# Altium PCB TurboCtrl.PcbDoc (part 1 of 2)
Units mil, origin at the board's own origin, x right, y up, seen from the top; angles counter-clockwise.
Board outline 1584.83 x 1584.83 mil, 4 copper layers (Top Layer, GND, SIGNAL, Bottom Layer), stack 61.85 mil thick; 89 components, 88 nets, 364 pads, 205 vias.
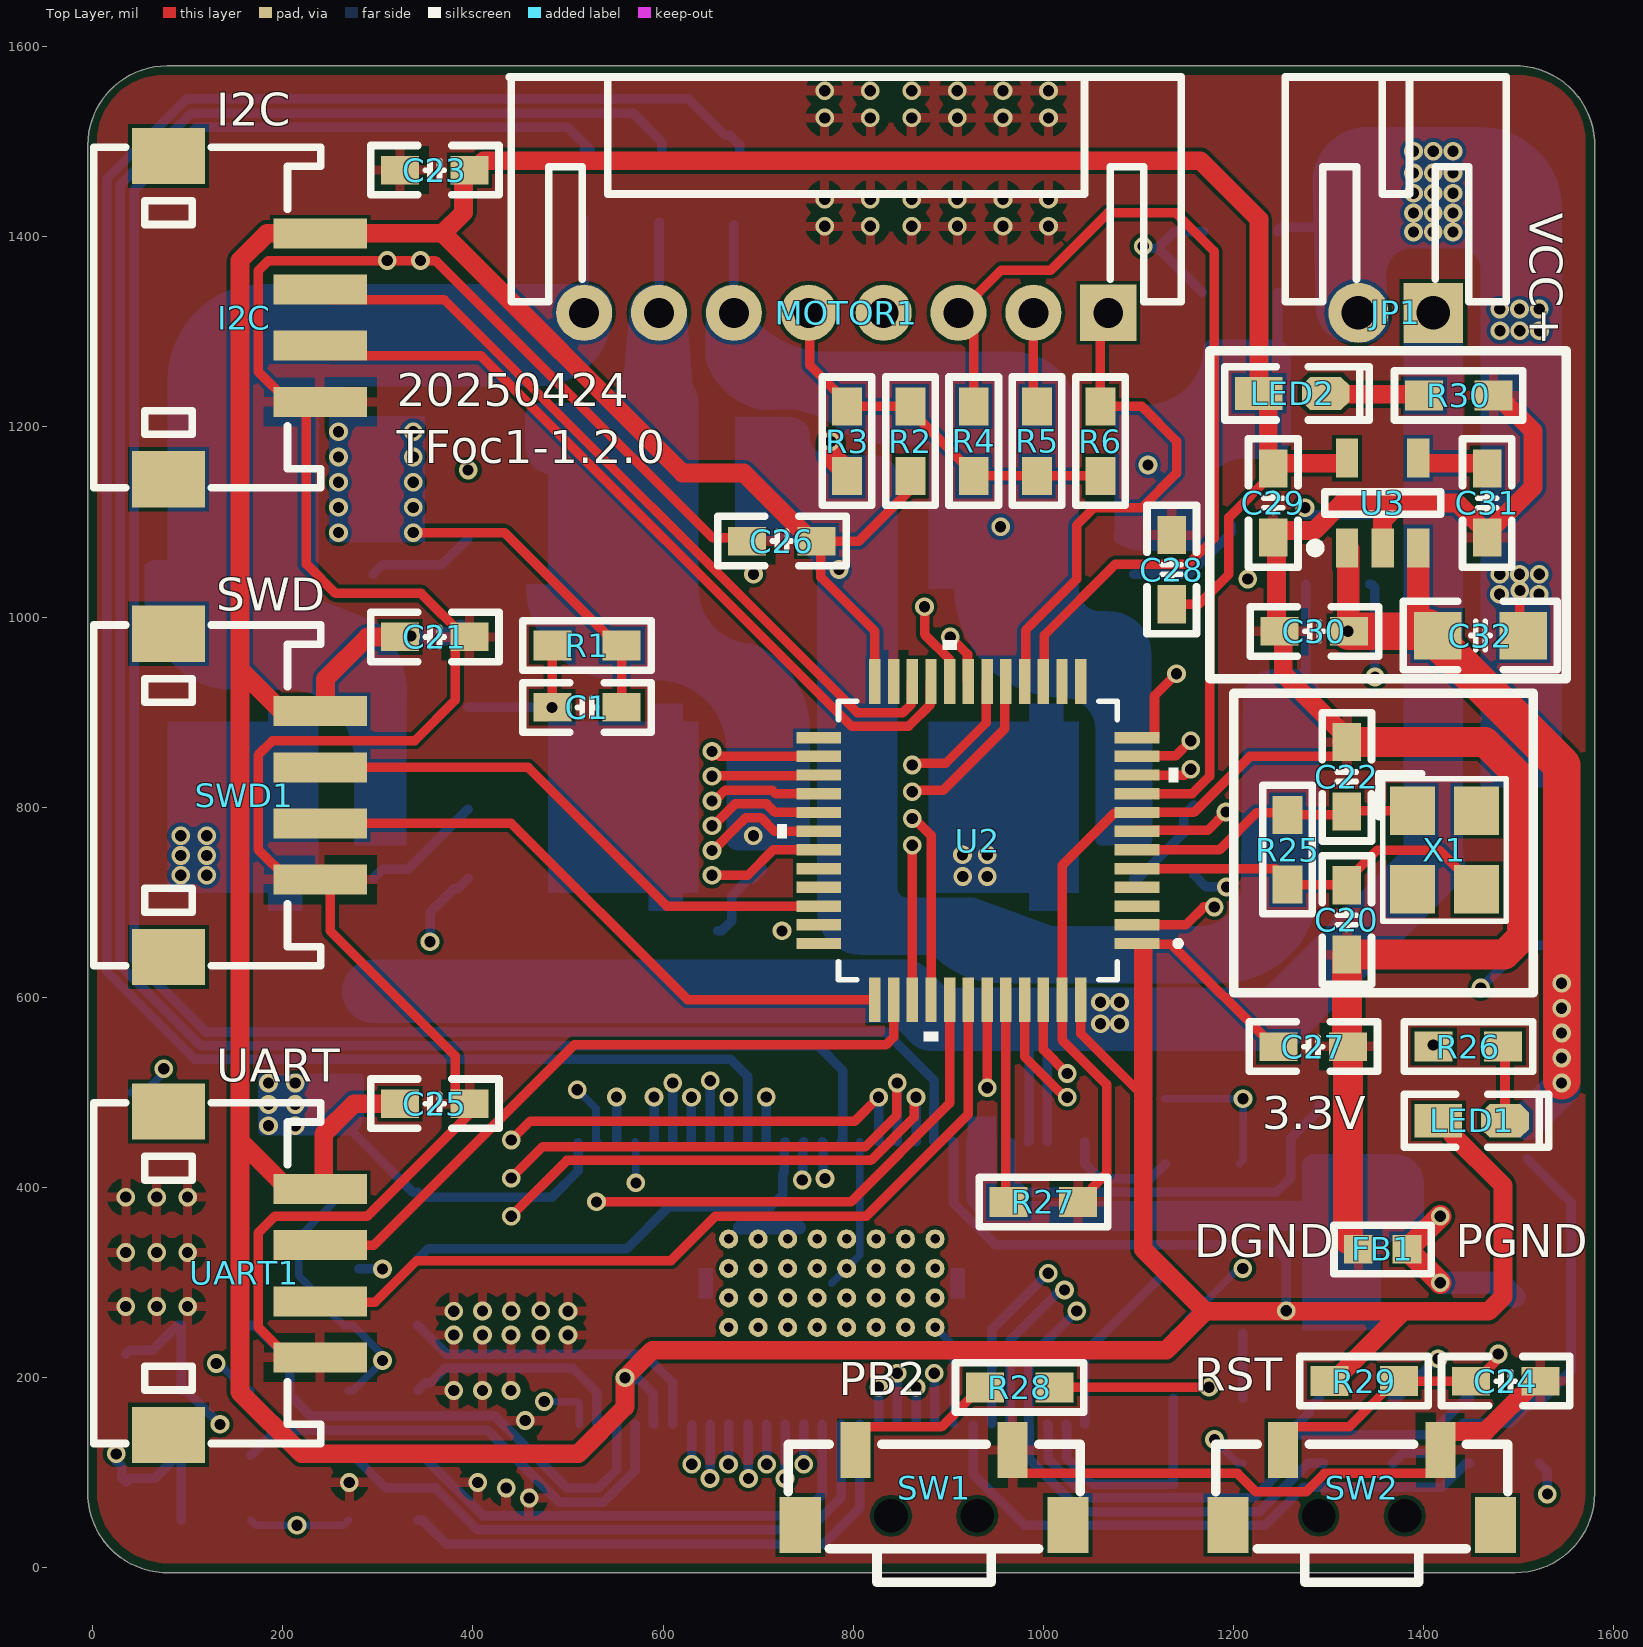
[diagram p0: Top Layer view]
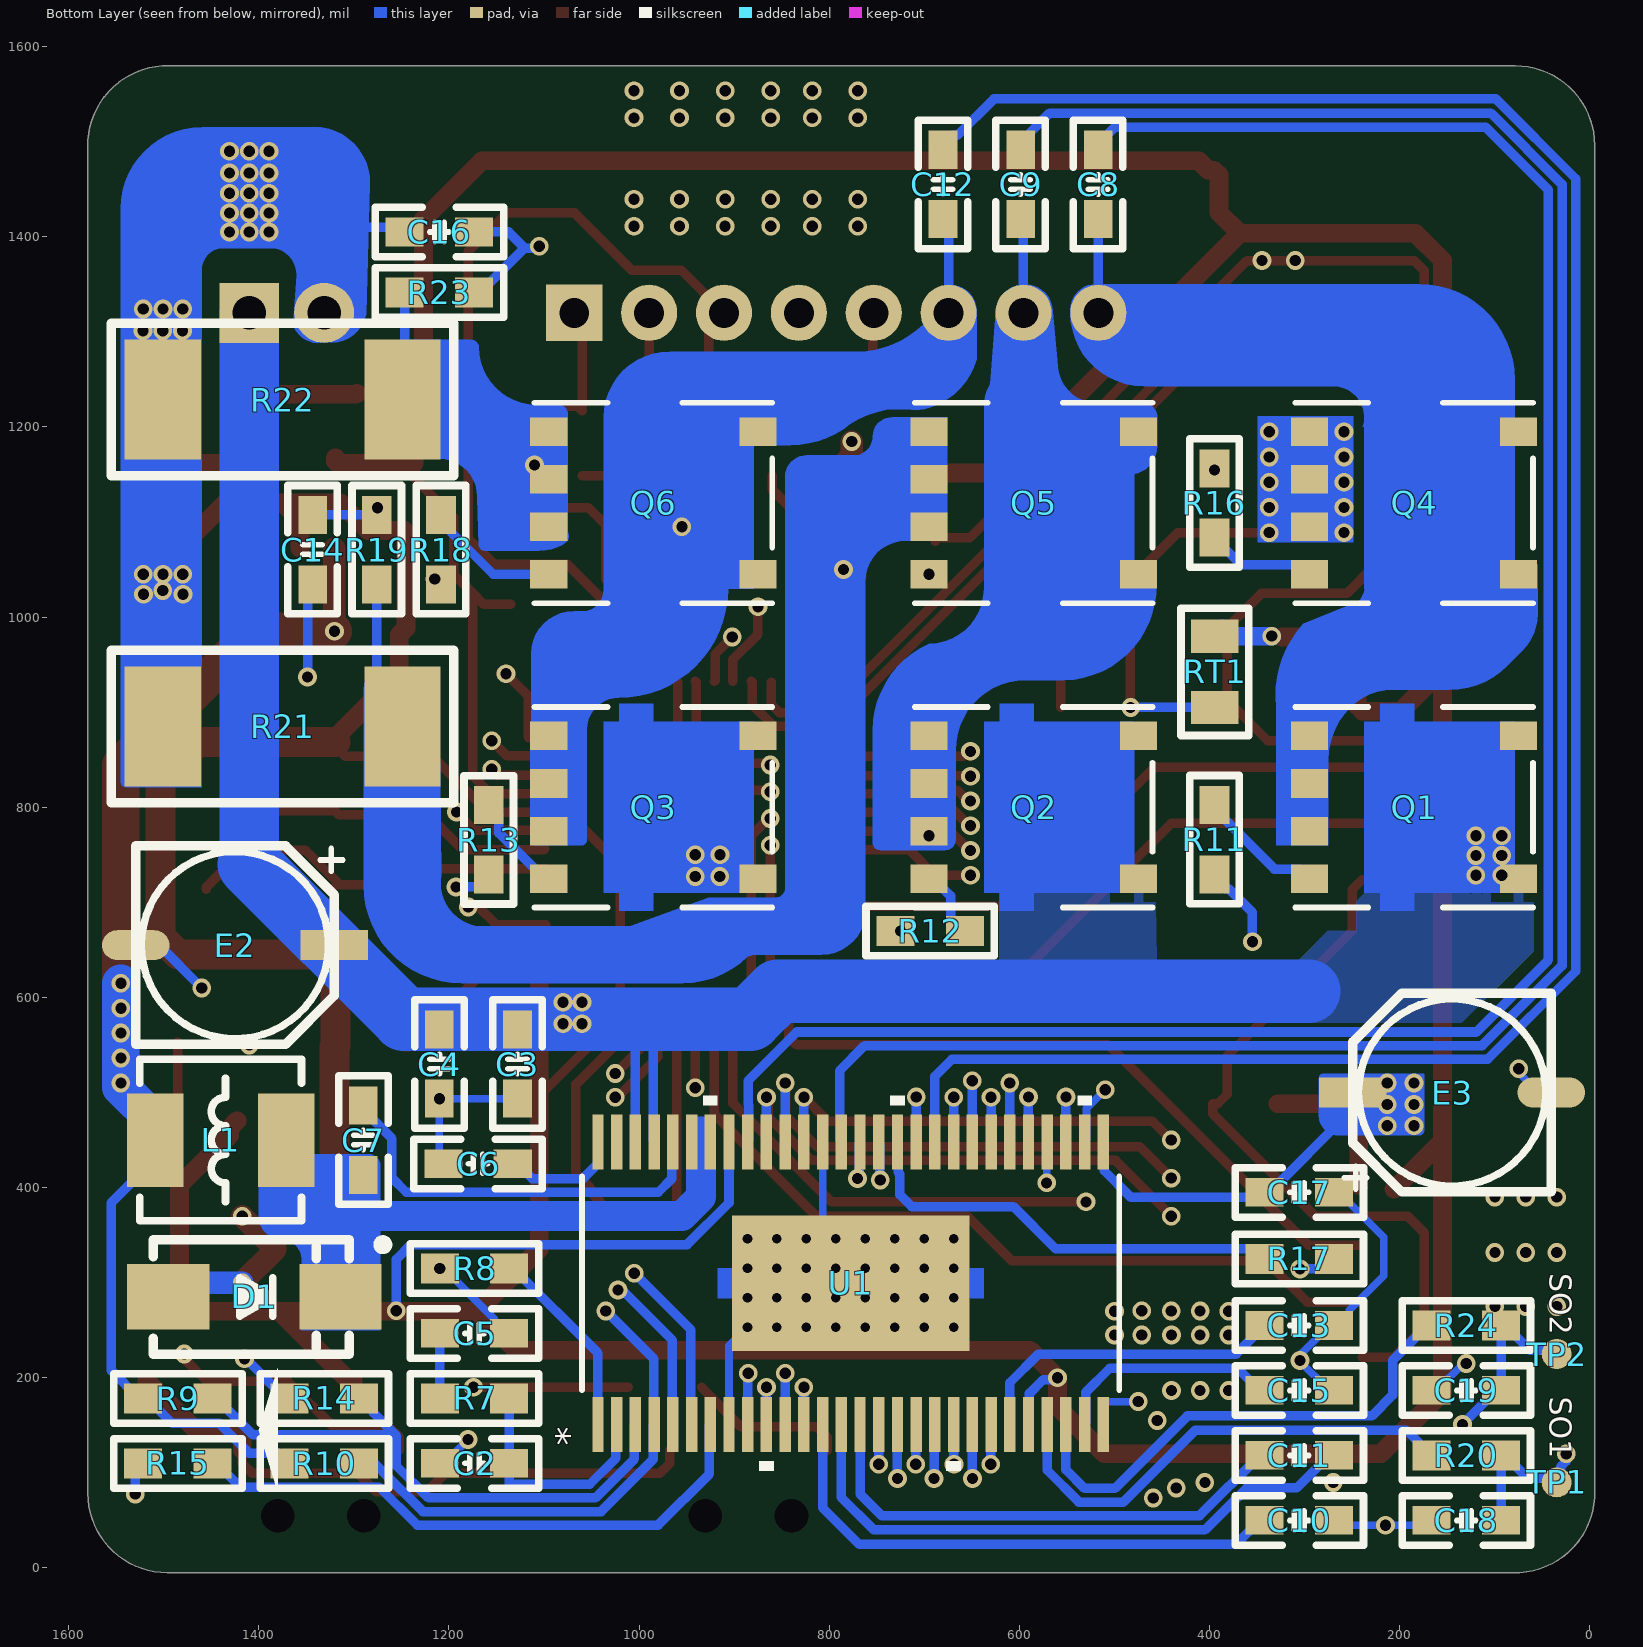
[diagram p1: Bottom Layer view, seen from below]
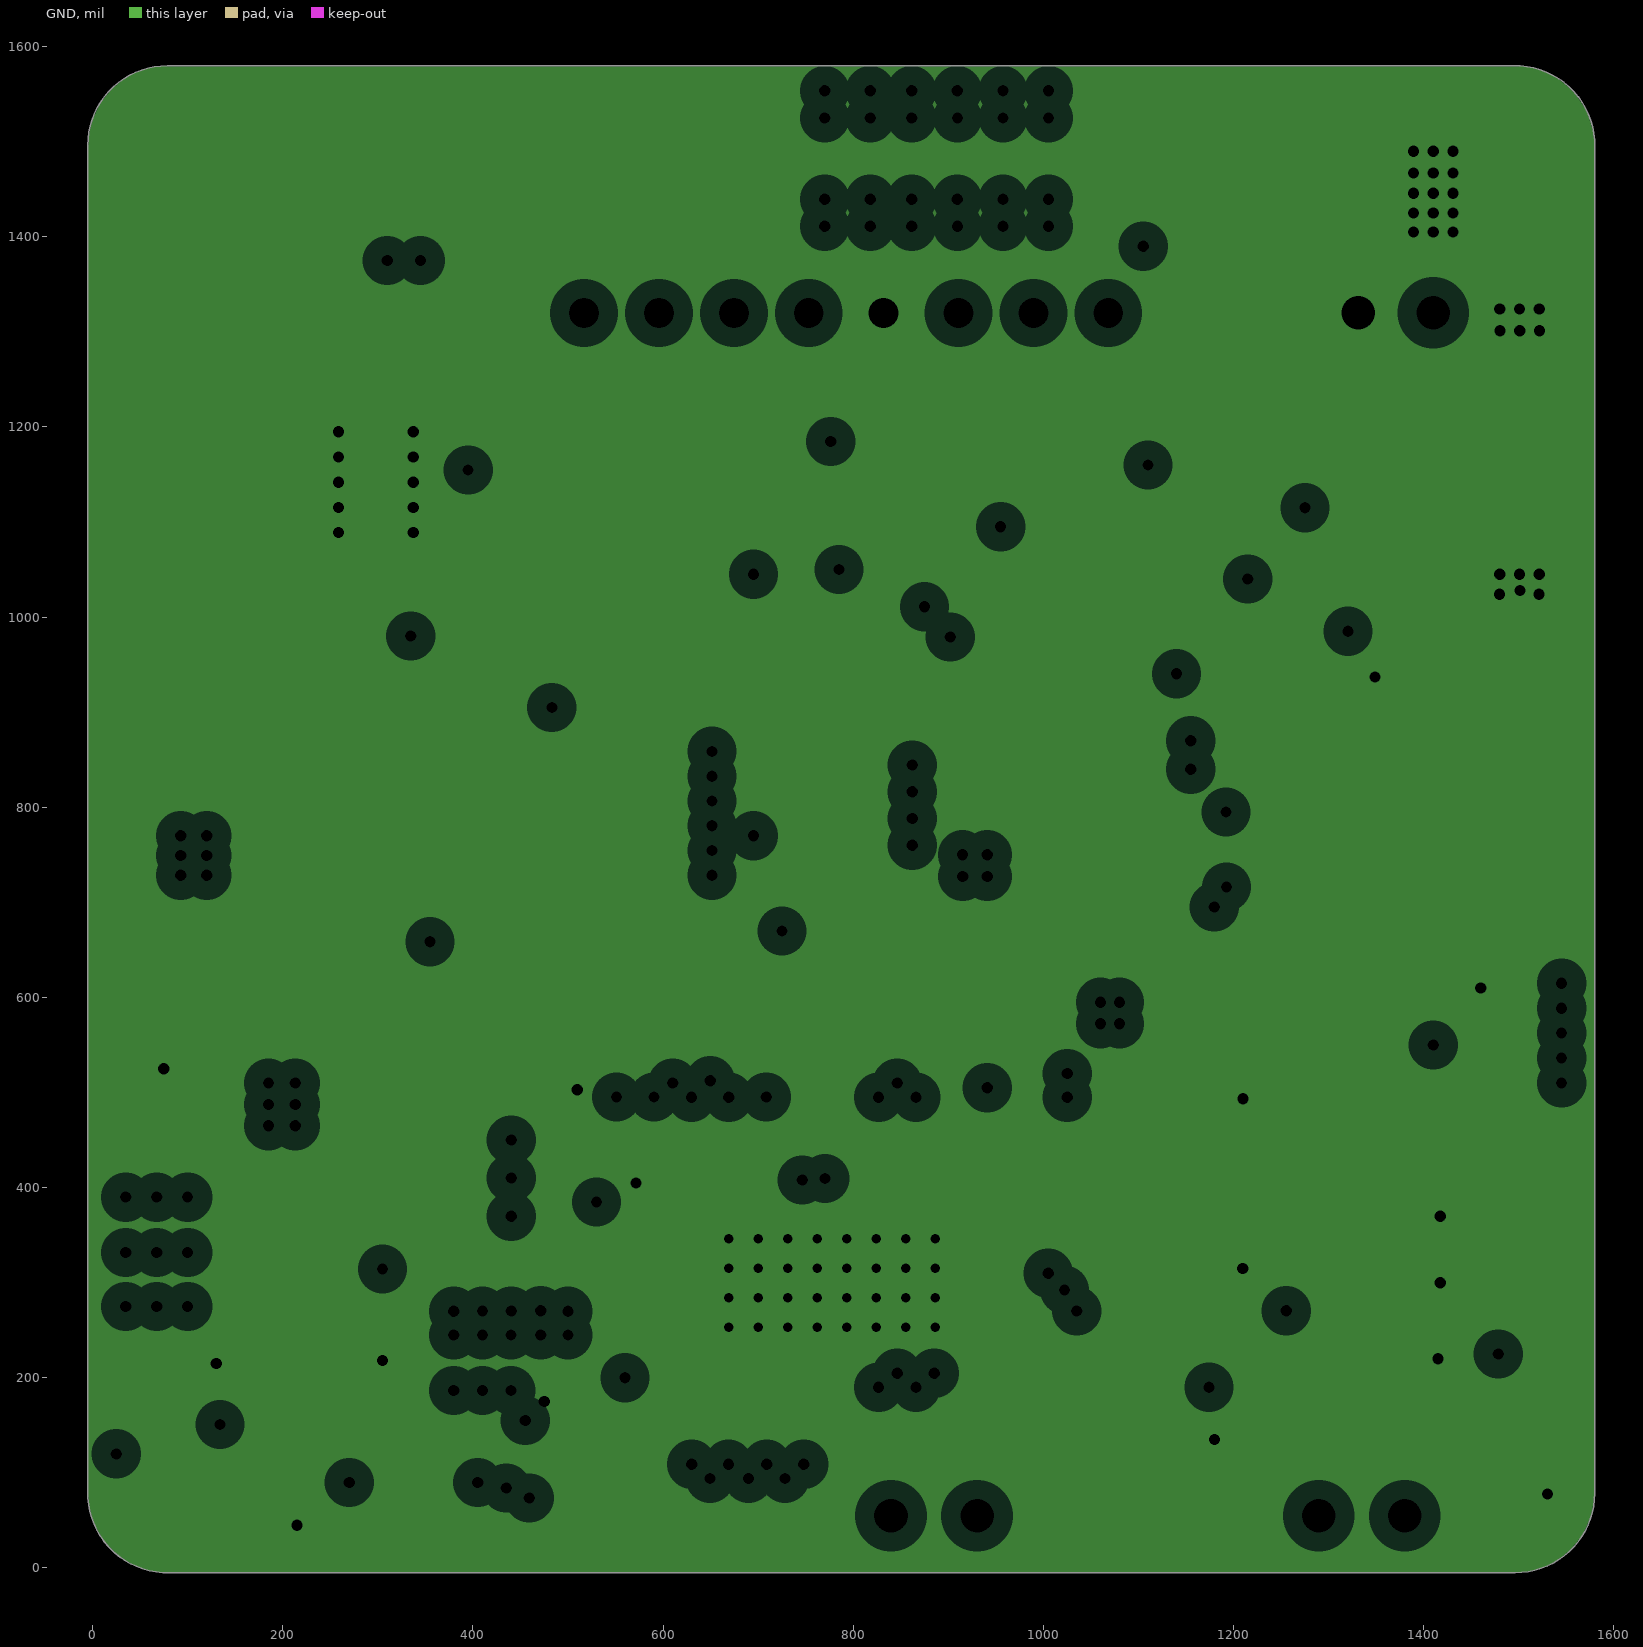
[diagram p2: GND, clearances drawn from the general rule]
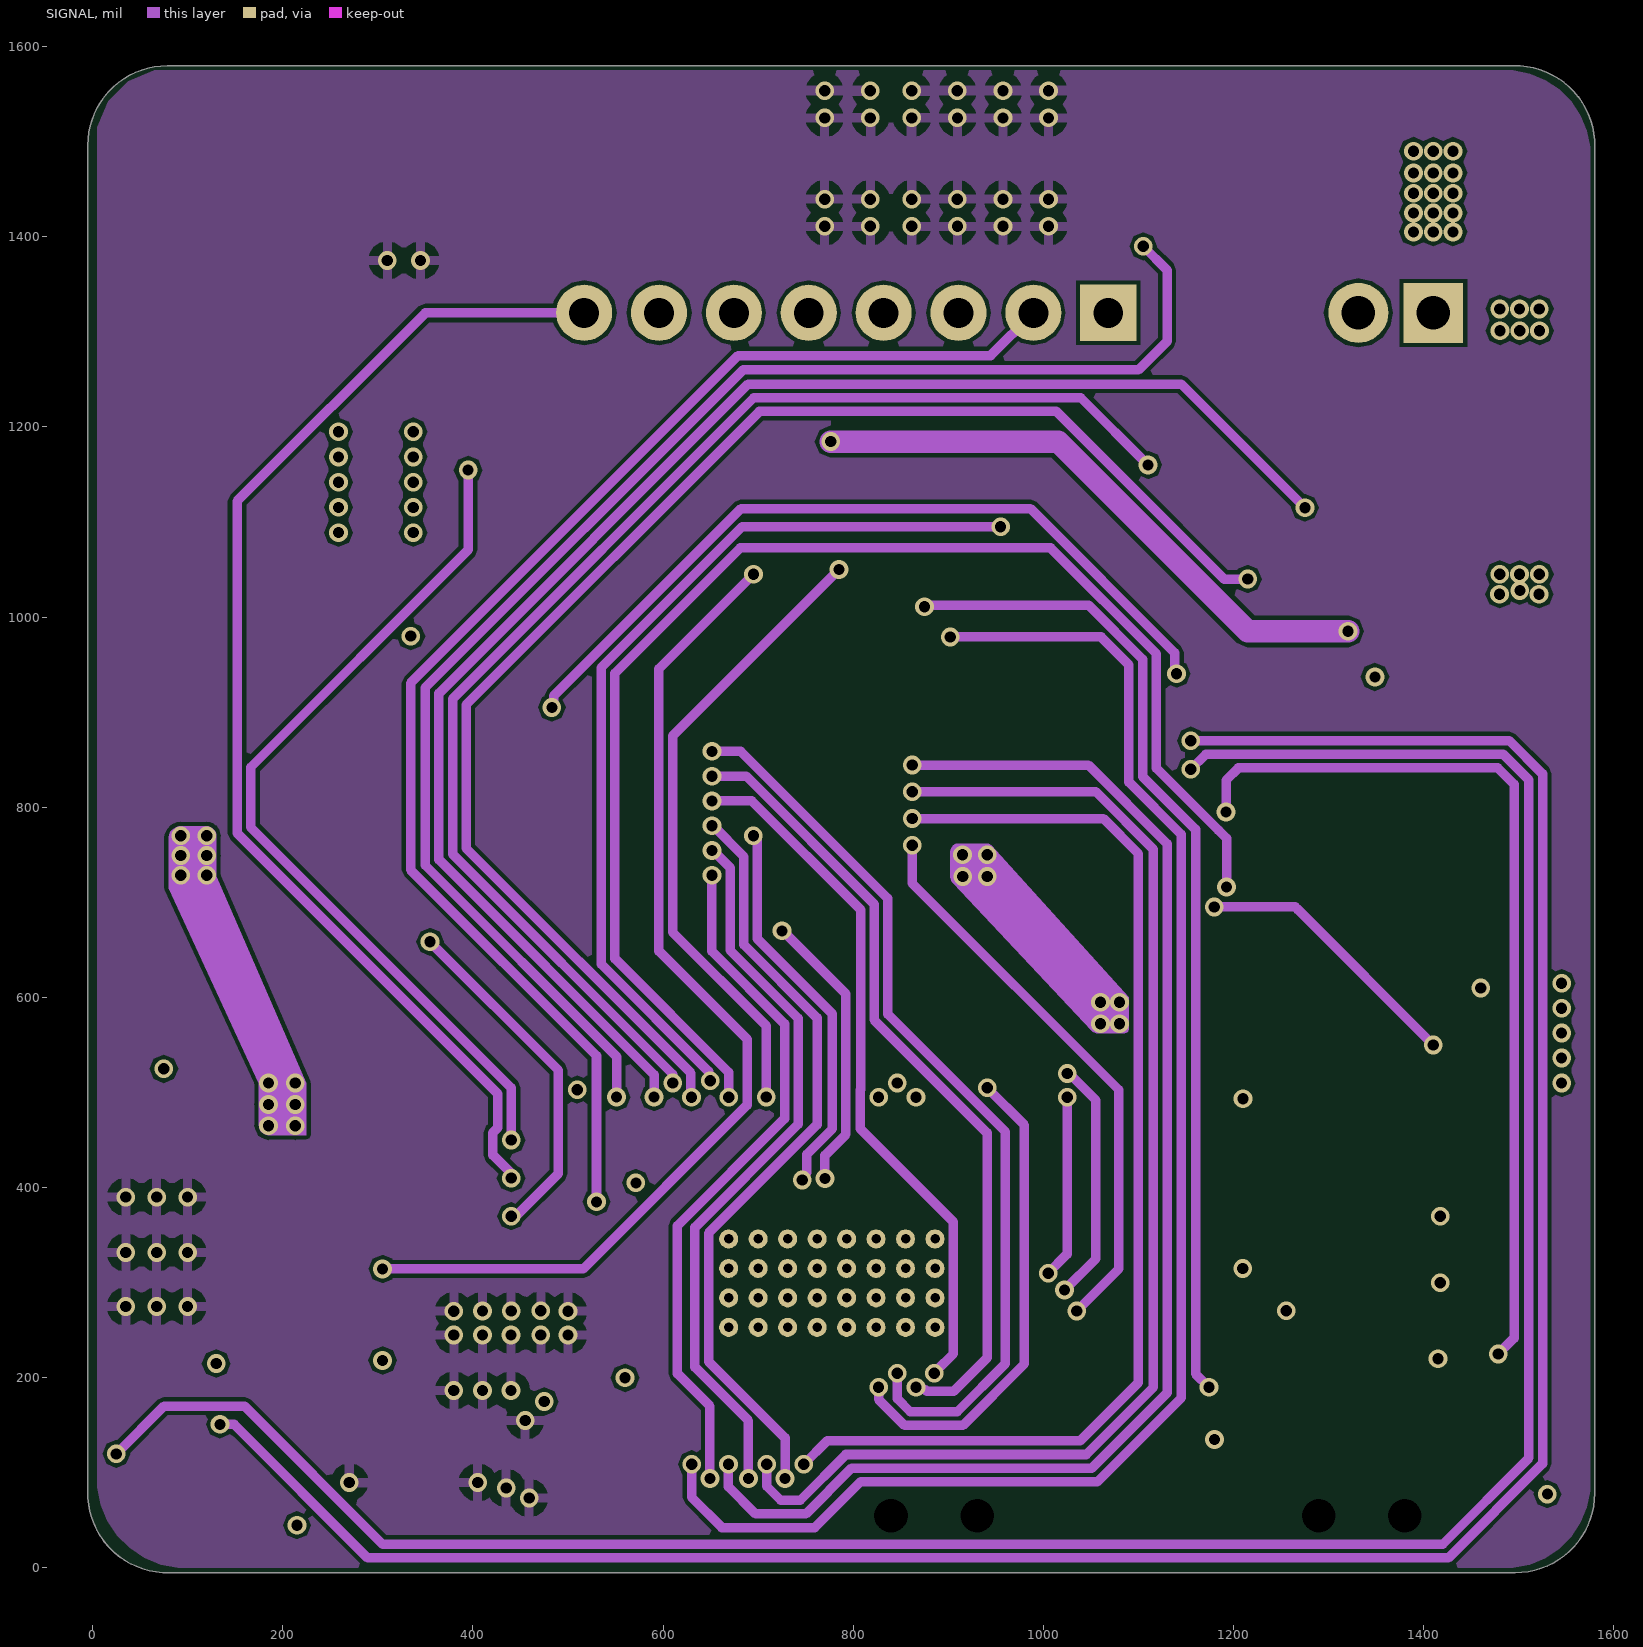
[diagram p3: SIGNAL]
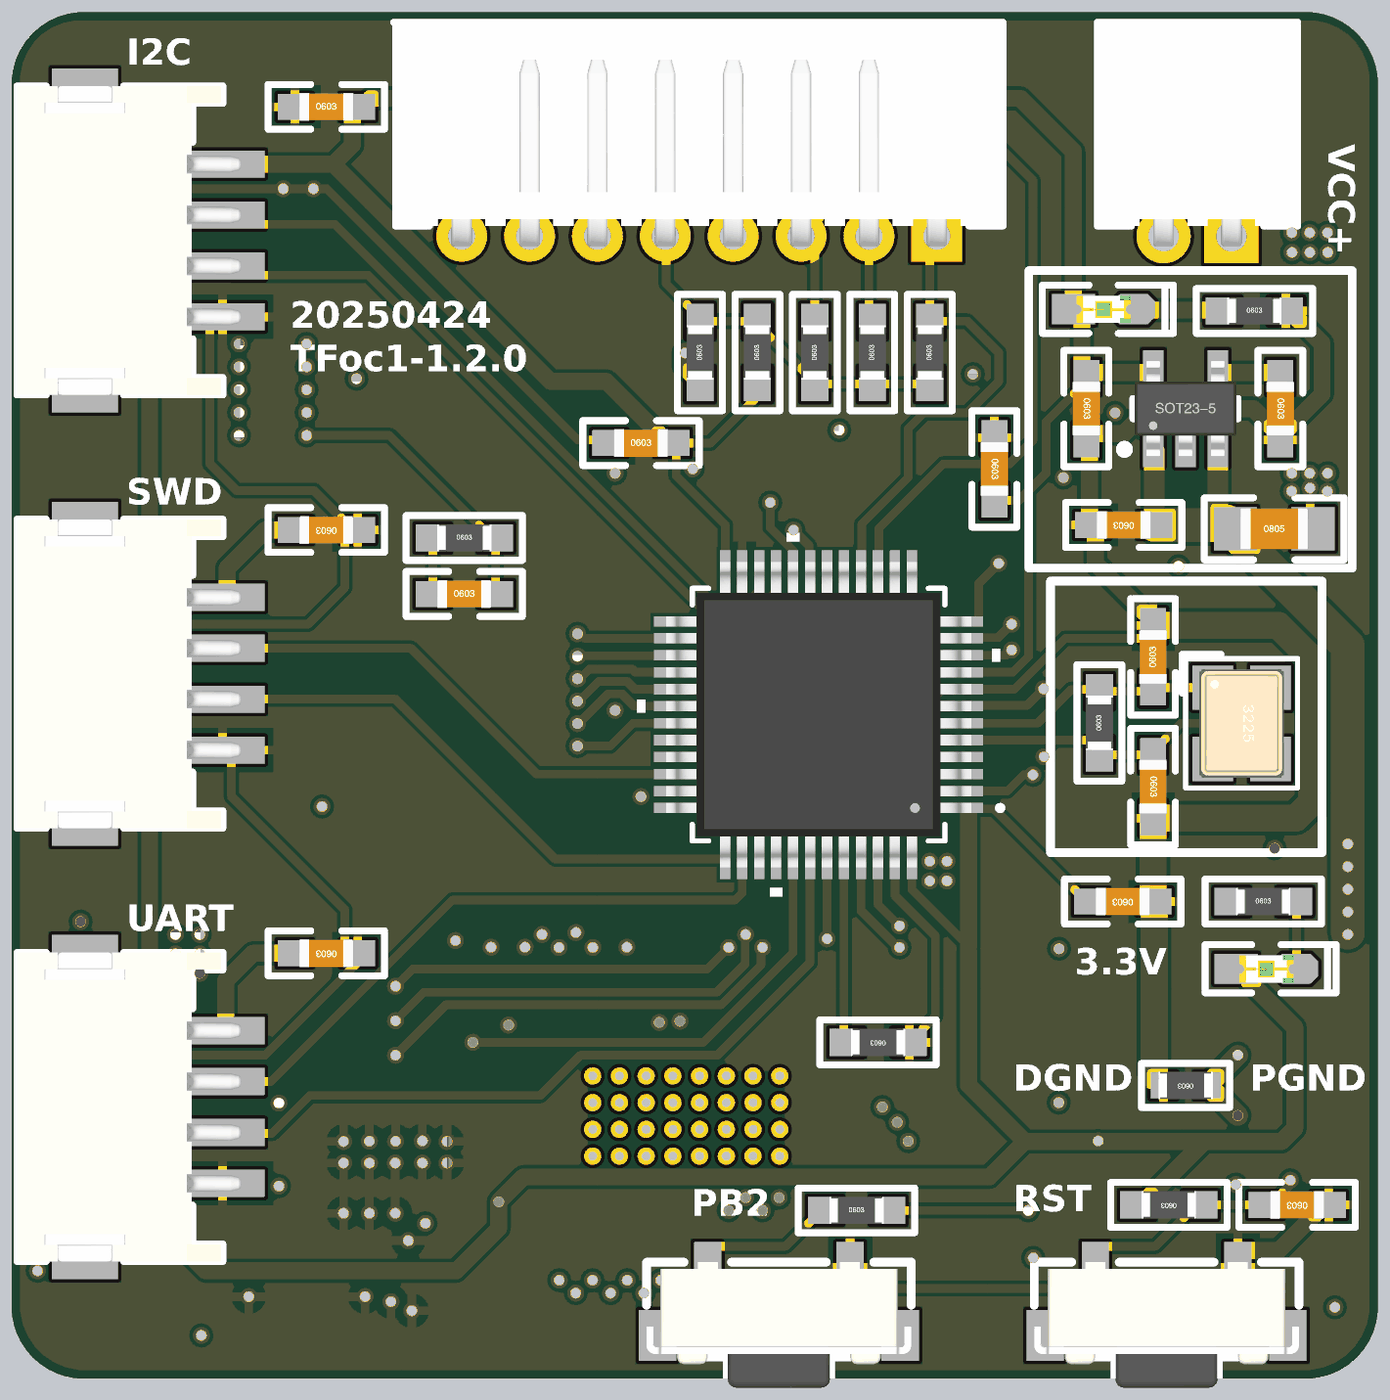
[diagram p5: 3D render of the assembled board from above, using the file's embedded part models]
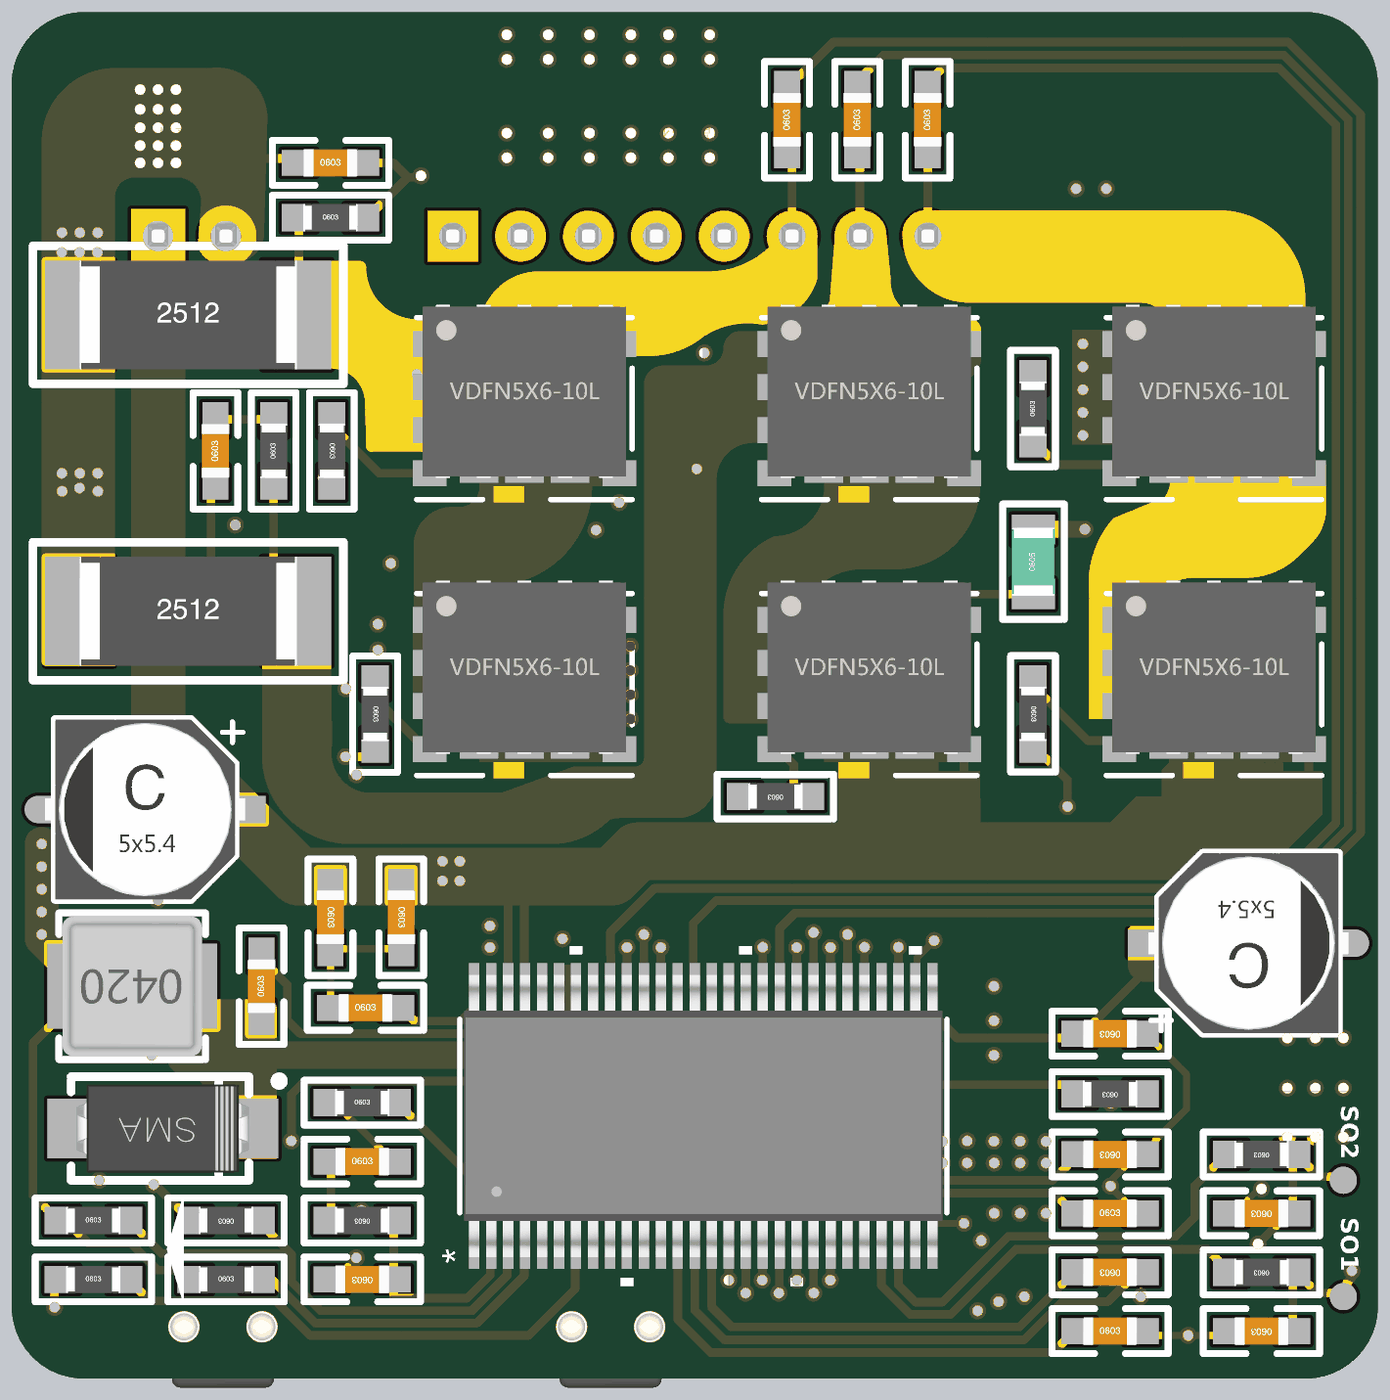
[diagram p6: 3D render of the assembled board from below, using the file's embedded part models]

## Layer stack, top to bottom
Top Solder: solder mask 0.4, Solder Resist, Dk 3.5
Top Layer: signal copper 1.3778
Dielectric 3: prepreg 7.874, PP-JLC7628, Dk 4.5
GND: plane copper 0.7086, net GND
Dielectric 1: core 41.9291, Core-JLC7628, Dk 4.6
SIGNAL: signal copper 0.7086
Dielectric 2: prepreg 7.874, PP-JLC7628, Dk 4.5
Bottom Layer: signal copper 1.3778
Bottom Solder: solder mask 0.4, Solder Resist, Dk 3.5

## Board outline
73.8,-4.87 cw(c78.74,78.74) -4.87,73.8 cw(c0,75) -5.02,75 -5.02,1496.06 cw(c78.74,1496.06) 78.74,1579.82 cw(c78.74,1574.8) 78.77,1579.82 1500.2,1579.82 cw(c1500.2,1574.8) 1501.52,1579.64 cw(c1496.06,1496.06) 1579.64,1501.52 cw(c1574.8,1500.2) 1579.82,1500.2 1579.82,78.74 cw(c1496.06,78.74) 1496.06,-5.01 75,-5.01 cw(c75,0)

## Design rules (kind name [scope] priority, off if disabled: settings)
Clearance [All] p1: gap=4 ignorepadtopadclearanceinfootprint=TRUE
PlaneClearance [All] p1: clearance=20
PlaneConnect [All] p1: planeconnectstyle=Direct reliefexpansion=5 reliefentries=4 reliefconductorwidth=10 reliefairgap=5
PolygonConnect [All] p1: connectstyle=Relief reliefconductorwidth=10 reliefentries=4 polygonreliefangle="90 Angle" airgapwidth=10
RoutingVias [All] p1: holewidth=11.81 width=19.68 viastyle="Through Hole" minholewidth=7.87 minwidth=17.72 maxholewidth=11.81 maxwidth=19.68
ShortCircuit [All] p1: allowed=TRUE
SolderMaskExpansion [All] p1: expansion=4
UnRoutedNet [All] p1: checkbadconnections=TRUE
Width [All] p1: maxlimit=196.85 minlimit=0.39 preferedwidth=10
26 further rules are at their usual default settings.

## Classes and differential pairs
component class U_POWER: C29 C30 C31 FB1 JP1 LED2 R30 U3
component class MAIN: I2C
component class U_STM32F031C6T6: C20 C21 C22 C23 C24 C25 C26 C27 C28 LED1 R25 R26 R27 R28 R29 SW1 SW2 SWD1 U2 UART1 X1
component class U_MOTOR: C1 C2 C3 C4 C5 C6 C7 C8 C9 C10 C11 C12 C13 C14 C15 C16 C17 C18 C19 C32 D1 E2 E3 L1 MOTOR1 Q1 Q2 Q3 Q4 Q5 Q6 R1 R2 R3 R4 R5 R6 R7 R8 R9 R10 R11 R12 R13 R14 R15 R16 R17 R18 R19 R20 R21 R22 R23 R24 RT1 TP1 TP2 U1

## Components (designator, comment, footprint, x,y, rotation, side; value= is the part's Value field where it differs from the comment)
C1 "2.2uF" C0603_M 520,905 r0 top
C2 "82pF" C0603_M 1173.09,110 r0 bottom
C3 "68nF" C0603_M 1127.89,530 r270 bottom
C4 "4.7uF" C0603_M 1210,530 r270 bottom
C5 "270pF" C0603_M 1173.09,246.67 r180 bottom
C6 "6.8nF" C0603_M 1169.39,425 r180 bottom
C7 "100nF" C0603_M 1290,450 r90 bottom
C8 "100nF" C0603_M 517.27,1455 r90 bottom
C9 "100nF" C0603_M 598.84,1455 r90 bottom
C10 "2.2uF" C0603_M 305.68,50 r180 bottom
C11 "22nF" C0603_M 305.68,118.33 r0 bottom
C12 "100nF" C0603_M 680.41,1455 r90 bottom
C13 "2.2uF" C0603_M 305.68,255 r0 bottom
C14 "2.2nF" C0603_M 1343.42,1070.94 r90 bottom
C15 "2.2uF" C0603_M 305.68,186.67 r180 bottom
C16 "2.2nF" C0603_M 1210.02,1405 r180 bottom
C17 "68nF" C0603_M 305.68,395 r0 bottom
C18 "2.2uF" C0603_M 130,50 r0 bottom
C19 "2.2uF" C0603_M 130,186.67 r0 bottom
C20 "20pF" C0603_M 1319.06,681.5 r270 top
C21 "100nF" C0603_M 360,979.13 r180 top
C22 "20pF" C0603_M 1319.06,832.01 r90 top
C23 "100nF" C0603_M 360,1470 r0 top
C24 "1uF" C0603_M 1486.19,196.42 r180 top
C25 "100nF" C0603_M 360,488.26 r180 top
C26 "100nF" C0603_M 725,1080 r0 top
C27 "100nF" C0603_M 1283.85,548.26 r180 top
C28 "100nF" C0603_M 1135,1050 r270 top
C29 "1uF" C0603_M 1241.69,1120 r270 top
C30 "1nF" C0603_M 1285,985 r180 top
C31 "22nF" C0603_M 1466.69,1120 r270 top
C32 "100nF" C0805_M 1459.56,980.57 r0 top
D1 "SS24" SMA 1404.57,285 r180 bottom
E2 "10uF/50V" "CE C(5*5.4)" 1425,655 r180 bottom
E3 "10uF/50V" "CE C(5*5.4)" 145,500 r0 bottom
FB1 "0R" R0603_L 1356.79,335 r180 top
I2C "HDR-1X4" ZH1.5-WS-4P 80,1315 r270 top
JP1 "HDR-1X2" PH2.0-W-2P 1370.63,1320 r180 top
L1 "22uH" L-SMD-0420 1440,450 r0 bottom
LED1 "蓝色" LED0603_B 1450.43,470 r0 top
LED2 "红色" LED0603_R 1261.69,1235 r0 top
MOTOR1 "HDR-1X8" PH2.0-W-8P 792.6,1320 r180 top
Q1 "MOSFET-N" DFN5_5X6_ONS 185,800 r180 bottom
Q2 "MOSFET-N" DFN5_5X6_ONS 585,800 r180 bottom
Q3 "MOSFET-N" DFN5_5X6_ONS 985,800 r180 bottom
Q4 "MOSFET-N" DFN5_5X6_ONS 185,1120 r180 bottom
Q5 "MOSFET-N" DFN5_5X6_ONS 585,1120 r180 bottom
Q6 "MOSFET-N" DFN5_5X6_ONS 985,1120 r180 bottom
R1 "3.3K" R0603_M 520,970 r0 top
R2 "0R" R0603_M 860.14,1185 r90 top
R3 "0R" R0603_M 793.52,1185 r90 top
R4 "120R" R0603_M 926.76,1185 r90 top
R5 "120R" R0603_M 993.38,1185 r90 top
R6 "120R" R0603_M 1060,1185 r90 top
R7 "47K" R0603_M 1173.09,178.33 r0 bottom
R8 "220k" R0603_M 1173.09,315 r180 bottom
R9 "18K" R0603_M 1485,178.33 r180 bottom
R10 "10K" R0603_M 1331.07,110 r180 bottom
R11 "2.2R" R0603_M 395,765.89 r270 bottom
R12 "2.2R" R0603_M 693.85,670 r0 bottom
R13 "2.2R" R0603_M 1158.14,765.72 r270 bottom
R14 "3.3K" R0603_M 1331.07,178.33 r0 bottom
R15 "18K" R0603_M 1485,110 r180 bottom
R16 "2.2R" R0603_M 395,1120 r90 bottom
R17 "2.2R" R0603_M 305.68,325 r0 bottom
R18 "2.2R" R0603_M 1208.42,1070.94 r270 bottom
R19 "120R" R0603_M 1275.92,1070.94 r90 bottom
R20 "22R" R0603_M 130,118.33 r0 bottom
R21 "500uOhm" R2512_M 1375,885 r180 bottom
R22 "500uOhm" R2512_M 1375,1228.79 r180 bottom
R23 "120R" R0603_M 1210.02,1341.39 r180 bottom
R24 "22R" R0603_M 130,255 r0 bottom
R25 "1M" R0603_M 1256.82,755.47 r90 top
R26 "10K" R0603_M 1446.94,548.26 r0 top
R27 "10K" R0603_M 1000,385 r180 top
R28 "10K" R0603_M 975,190 r0 top
R29 "10K" R0603_M 1337.26,196.42 r180 top
R30 "1K" R0603_M 1436.69,1233.26 r0 top
RT1 "10K" R0805-HP_L 394.72,942.37 r90 bottom
SW1 "3x6x5" "SW 3*6*4.3-S-W" 885,55 r0 top
SW2 "3x6x5" "SW 3*6*4.3-S-W" 1334.72,55 r0 top
SWD1 "HDR-1X4" ZH1.5-WS-4P 80,812.5 r270 top
TP1 "SO1" "TEST 0.8" 35,90 r90 bottom
TP2 "SO2" "TEST 0.8" 35,225 r90 bottom
U1 "DRV8301DCA" DRV8301DCA 777.5,299.5 r90 bottom
U2 "STM32F031C6T6" LQFP48-7x7mm 931.01,765 r180 top
U3 "RT9193-30GB" SOT-23-5 1356.69,1120 r90 top
UART1 "HDR-1X4" ZH1.5-WS-4P 80,310 r270 top
X1 "8M" XTAL-3225-4P 1421.82,755 r270 top

## Footprints (in the part's own frame and the unit in brackets; to place one, negate y for a bottom-side part, rotate by r counter-clockwise, add the part's x,y. Pads: shape width x height; smd on the part's side, far side on the other; paste and mask are expansions set on the pad)
C0603_M [mil]
  rect 40x30 smd: 1(-36.5,0) 2(36.5,0)
  silkscreen extent -68,-26 68,26, body extent -31,-16 31,16, height 33
C0805_M [mil] "贴片M"
  rect 50x50 smd: 1(-45,0) 2(45,0)
  silkscreen extent -81,-36 81,36, body extent -39,-24 39,24, height 22
"CE C(5*5.4)" [mm] "贴片电解电容，直径5mm，高5.4mm            联系卖家 免费查找封装"
  rect 1.8x0.8 smd: 1(2.65,0)
  oval 1.8x0.8 smd: 2(-2.65,0)
  silkscreen extent -2.65,-2.65 2.88,2.65, body extent -2.95,-2.65 2.95,2.65, height 5.48
DFN5_5X6_ONS [mil]
  rect 39x30 smd paste+0 mask+0: D(110.04,-75) D(110.04,75) G(-110.04,-75) S(-110.04,-25) S(-110.04,25) S(-110.04,75)
  Top Layer region: 0,-90 -35.63,-90 -35.63,-90 -35.63,-90 -35.63,-109 0,-109 0,-90 0,-90
  Top Layer region: 0,90 -35.63,90 -35.63,90 -35.63,90 -35.63,109 0,109 0,90 0,90
  Top Layer region: 105.77,90 -52.23,90 -52.23,-90 105.77,-90
  silkscreen extent -125,-106 125,106, body extent -118,-80 118,120, height 42
DRV8301DCA [mil]
  rect 57.56x12 smd paste+0 mask+0: 1(-148.5,265.75) 2(-148.5,246.06) 3(-148.5,226.38) 4(-148.5,206.69) 5(-148.5,187.01) 6(-148.5,167.32) 7(-148.5,147.64) 8(-148.5,127.95) 9(-148.5,108.27) 10(-148.5,88.58) 11(-148.5,68.9) 12(-148.5,49.21) 13(-148.5,29.53) 14(-148.5,9.84) 15(-148.5,-9.84) 16(-148.5,-29.53) 17(-148.5,-49.21) 18(-148.5,-68.9) 19(-148.5,-88.58) 20(-148.5,-108.27) 21(-148.5,-127.95) 22(-148.5,-147.64) 23(-148.5,-167.32) 24(-148.5,-187.01) 25(-148.5,-206.69) 26(-148.5,-226.38) 27(-148.5,-246.06) 28(-148.5,-265.75) 29(148.5,-265.75) 30(148.5,-246.06) 31(148.5,-226.38) 32(148.5,-206.69) 33(148.5,-187.01) 34(148.5,-167.32) 35(148.5,-147.64) 36(148.5,-127.95) 37(148.5,-108.27) 38(148.5,-88.58) 39(148.5,-68.9) 40(148.5,-49.21) 41(148.5,-29.53) 42(148.5,-9.84) 43(148.5,9.84) 44(148.5,29.53) 45(148.5,49.21) 46(148.5,68.9) 47(148.5,88.58) 48(148.5,108.27) 49(148.5,127.95) 50(148.5,147.64) 51(148.5,167.32) 52(148.5,187.01) 53(148.5,206.69) 54(148.5,226.38) 55(148.5,246.06) 56(148.5,265.75)
  rect 142.13x250 smd paste-124.5 mask-124.5: 57(0,0)
  round 20 hole 10: V(-46.5,-108.5) V(-46.5,-77.5) V(-46.5,-46.5) V(-46.5,-15.5) V(-46.5,15.5) V(-46.5,46.5) V(-46.5,77.5) V(-46.5,108.5) V(-15.5,-108.5) V(-15.5,-77.5) V(-15.5,-46.5) V(-15.5,-15.5) V(-15.5,15.5) V(-15.5,46.5) V(-15.5,77.5) V(-15.5,108.5) V(15.5,-108.5) V(15.5,-77.5) V(15.5,-46.5) V(15.5,-15.5) V(15.5,15.5) V(15.5,46.5) V(15.5,77.5) V(15.5,108.5) V(46.5,-108.5) V(46.5,-77.5) V(46.5,-46.5) V(46.5,-15.5) V(46.5,15.5) V(46.5,46.5) V(46.5,77.5) V(46.5,108.5)
  Top Layer region: 15.75,-125 -15.75,-125 -15.75,-125 -15.75,-125 -15.75,-139.96 15.75,-139.96 15.75,-125 15.75,-125
  Top Layer region: 15.75,125 -15.75,125 -15.75,125 -15.75,125 -15.75,139.96 15.75,139.96 15.75,125 15.75,125
  silkscreen extent -197,-282 197,282, body extent -164,-277 164,277, height 67
L-SMD-0420 [mm]
  rect 1.5x2.5 smd: 1(-1.75,0) 2(1.75,0)
  silkscreen extent -2.16,-2.16 2.16,2.16, body extent -2.25,-2.05 2.25,2.05
LED0603_B [mil] "蓝色0603LED"
  rect 50x35 smd: 1(-35,0.26)
  oct 50x35 smd: 2(35,0.26)
  silkscreen extent -71,-28 81,28, body extent -32,-16 31,16, height 18
LED0603_R [mil] "红色0603LED"
  rect 50x35 smd: 1(-35,0.26)
  oct 50x35 smd: 2(35,0.26)
  silkscreen extent -71,-28 81,28, body extent -32,-16 31,16, height 18
LQFP48-7x7mm [mil]
  rect 47x12 smd paste+0 mask+0: 1(-167.32,108.27) 2(-167.32,88.58) 3(-167.32,68.9) 4(-167.32,49.21) 5(-167.32,29.53) 6(-167.32,9.84) 7(-167.32,-9.84) 8(-167.32,-29.53) 9(-167.32,-49.21) 10(-167.32,-68.9) 11(-167.32,-88.58) 12(-167.32,-108.27) 25(167.32,-108.27) 26(167.32,-88.58) 27(167.32,-68.9) 28(167.32,-49.21) 29(167.32,-29.53) 30(167.32,-9.84) 31(167.32,9.84) 32(167.32,29.53) 33(167.32,49.21) 34(167.32,68.9) 35(167.32,88.58) 36(167.32,108.27)
  rect 12x47 smd paste+0 mask+0: 13(-108.27,-167.32) 14(-88.58,-167.32) 15(-68.9,-167.32) 16(-49.21,-167.32) 17(-29.53,-167.32) 18(-9.84,-167.32) 19(9.84,-167.32) 20(29.53,-167.32) 21(49.21,-167.32) 22(68.9,-167.32) 23(88.58,-167.32) 24(108.27,-167.32) 37(108.27,167.32) 38(88.58,167.32) 39(68.9,167.32) 40(49.21,167.32) 41(29.53,167.32) 42(9.84,167.32) 43(-9.84,167.32) 44(-29.53,167.32) 45(-49.21,167.32) 46(-68.9,167.32) 47(-88.58,167.32) 48(-108.27,167.32)
  silkscreen extent -214,-211 211,211, body extent -177,-177 177,177, height 63
PH2.0-W-2P [mm] "长：5.9mm，宽：6mm，高：4.7mm"
  rect 1.6x1.6 hole 0.9: 1(-1,0)
  round 1.6 hole 0.9: 2(1,0)
  silkscreen extent -2.95,-6.3 2.95,-0.3, body extent -2.95,-6.3 2.95,0.3, height 4.75
PH2.0-W-8P [mm] "长：17.9mm，宽：6mm，高：4.7mm     淘宝ID:黄晶宝石"
  rect 1.5x1.5 hole 0.8: 1(-7,0)
  round 1.5 hole 0.8: 2(-5,0) 3(-3,0) 4(-1,0) 5(1,0) 6(3,0) 7(5,0) 8(7,0)
  silkscreen extent -8.95,-6.3 9,-0.3, body extent -8.95,-6.3 8.95,0.3, height 4.75
R0603_L [mil] "1/10W贴片电阻"
  rect 30x30 smd: 1(-25.59,0) 2(25.59,0)
  silkscreen extent -51,-26 51,26, body extent -31,-16 32,16, height 16
R0603_M [mil]
  rect 40x31.5 smd: 1(-36.5,0) 2(36.5,0)
  silkscreen extent -68,-26 68,26, body extent -31,-16 31,16, height 16
R0805-HP_L [mil]
  rect 35x50 smd: 1(-37.4,0) 2(37.4,0)
  silkscreen extent -67,-36 67,35, body extent -39,-25 39,25, height 20
R2512_M [mm]
  rect 2.032x3.2 smd: 1(-3.2,0) 2(3.2,0)
  silkscreen extent -4.57,-2.03 4.57,2.03, body extent -3.2,-1.6 3.2,1.6, height 0.55
SMA [mm] "4.5x2.6*2.2mm（长宽高，不包括引脚）联系卖家 免?"
  rect 2.2x1.75 smd: 1(-2.3,0) 2(2.3,0)
  silkscreen extent -2.7,-1.52 3.56,1.52, body extent -2.55,-1.3 2.55,1.3, height 2.15
SOT-23-5 [mm] "SOT23, 5-Leads, Body 2.9x1.6mm, Pitch 0.95mm, IPC Medium Density"
  rect 1.05x0.6 smd: 1(-1.2,0.95) 2(-1.2,0) 3(-1.2,-0.95) 4(1.2,-0.95) 5(1.2,0.95)
  silkscreen extent -1.32,-1.55 0.3,1.92, body extent -1.4,-1.5 1.4,1.5, height 1.15
"SW 3*6*4.3-S-W" [mm] "侧立贴片3*6*4.3"
  rect 1.1x1.5 smd: 0(-3.575,-0.25) 0(3.575,-0.25)
  round 0 hole 0.9: 0(-1.15,0) 0(1.15,0)
  rect 0.8x1.5 smd: 1(2.1,1.75) 2(-2.1,1.75)
  silkscreen extent -3.9,-1.78 3.9,1.91, body extent -3.9,-1.79 3.9,1.91, height 3.51
"TEST 0.8" [mm] "?"
  round 0.8 smd: 1(0,0)
XTAL-3225-4P [mm] "3.2*2.5*0.7mm(长宽?"
  rect 1.3x1.2 smd: 1(-1.05,-0.85) 2(1.05,-0.85) 3(1.05,0.85) 4(-1.05,0.85)
  silkscreen extent -2.03,-1.75 1.91,1.65, body extent -1.6,-1.25 1.6,1.25, height 0.7
ZH1.5-WS-4P [mm] "长：9.1mm，宽：6.0mm，高：3.7mm淘宝ID:黄晶宝石   店铺网址:https://shop463601444.taobao.com"
  rect 1.5x1.95 smd: 0(-4.318,0) 0(4.318,0)
  rect 0.8x2.5 smd: 1(-2.25,4.05) 2(-0.75,4.05) 3(0.75,4.05) 4(2.25,4.05)
  silkscreen extent -4.55,-2 4.55,4.06, body extent -4.55,-2 4.55,4.6, height 3.75

## Part data
C1 C2 C3 C4 C5 C6 C7 C8 C9 C10 C11 C12 C13 C14 C15 C16 C17 C18 C19 C20 C21 C22 C23 C24 C25 C26 C27 C28 C29 C30 C31: library part C
C32: library part C, "贴片电容/MLCC电容"
D1: library part 1N4007, "整流二极管"
E2 E3: library part CE_SMD, "贴片电解电容"
FB1: library part R, "贴片电阻", BOM名称=ÌùÆ, 联系卖家，免费查找封装=唯一出售店铺网址https://shop
I2C SWD1 UART1: library part "Header 4", "4P接插件"
JP1: library part "Header 2", "2P接插件"
L1: library part L-Moldin
LED1 LED2: library part LED-SMD, "贴片LED"
MOTOR1: library part "Header 8", "8P接插件"
Q1 Q2 Q3 Q4 Q5 Q6: "N-Channel MOSFET", PackageDocument=1995/1996, LatestRevisionDate=17-Jul-2002, LatestRevisionNote="Re-released for DXP Platform.", PackageReference=E3, Published=8-Jun-2000, Publisher="Altium Limited"
SW1 SW2: library part "SW 3x6", "3x6轻触开关"
TP1 TP2: library part TEST, "测试点"
U1: "No Description Available", Mfr_Name="Texas Instruments", Copyright="Copyright (C) 2021 Ultra Librarian. All rights reserved.", Manufacturer_Part_Number=DRV8301DCA, RefDes=RefDes, Type=DEV
U2: "No Description Available", Mfr_Name=STMicroelectronics, Copyright="Copyright (C) 2021 Ultra Librarian. All rights reserved.", Manufacturer_Part_Number=STM32F031C6T6, RefDes=RefDes, Type=DEV
U3: "LDO 3.0V/0.3A", BOM名称=RT9193-30G, 封装库来自淘宝卖家ID：黄晶宝石=其他店, 芯片厂商=RICH
X1: library part XTAL-4P, "4脚无源晶振(谐振器）"

## Via types
v1: diameter 19.68, hole 11.81, Top Layer to Bottom Layer, tented both sides, 205 vias

## Nets (pads, with @x,y where several pads share a name; then routed paths per layer and width w, separated by ;. In a path a pad name is that pad's centre, name@x,y a point inside that pad or via, vN(x,y) a via of type N, cw(c..) or ccw(c..) an arc to the next point about the centre after c; other vN are vias at no path point)
+3.3V: C21.2 C23.2 C25.2 C26.2 C27.2 C28.2 C29.1 I2C.1 LED1.1 LED2.1 R2.1 R29.2 RT1.2 SWD1.1 U1.24 U1.49 U2.1 U2.9 U2.24 U2.48 U3.5 UART1.1 | length 7579.7
  Top Layer w10: C26.2@756.5,1080 C26.2@761.5,1080 ; U2.24@822.74,932.32 822.74,985.14 765.83,1042.06 765.83,1075.67 C26.2@761.5,1080 ; R2.1@860.14,1148.5 860.14,1134.25 805.89,1080 C26.2@761.5,1080 ; U2.48@1039.28,597.68 1039.28,562 1105,496.28 ; U2.9@1098.33,814.21 1156.33,814.21 1174.69,832.58 1174.69,1024.69 ; U2.1@1099.33,655.73 1134.87,655.73 1242.35,548.26 C27.2@1247.35,548.26 ; C28.2@1135,1013.5 1163.5,1013.5 1174.69,1024.69 ; C29.1@1241.69,1151.5 1195,1104.81 1195,1045 1174.69,1024.69
  Top Layer w19.68: UART1.1@205.98,398.58 155,449.57 ; SWD1.1@239.45,901.08 198.92,901.08 155,945 ; UART1.1@243.25,402.38 243.25,456.51 275,488.26 C25.2@323.5,488.26 C25.2@328.5,488.26 ; SWD1.1@245,906.63 245,935 289.13,979.13 C21.2@323.5,979.13 ; C26.2@756.5,1080 685,1151.5 620.42,1151.5 368.34,1403.58 ; 1105,491.5 1105,335.26 1170.26,270 ; 1105,496.28 U2.1@1105,652.89 ; LED2.1@1226.7,1235.26 1226.7,1418.3 1165.22,1479.78 411.28,1479.78 401.5,1470 C23.2@396.5,1470 395.39,1470 390.23,1464.84 390.23,1425.47 368.34,1403.58 ; LED2.1@1228.88,1235.26 1236.54,1227.6 1236.54,1161.66 C29.1@1241.69,1156.5 1241.69,1156.71 1246.85,1161.87 1317.32,1161.87 1319.29,1163.84 U3.5@1319.29,1167.24 ; R29.2@1300.76,196.42 1305.01,196.42 1378.59,270 ; LED1.1@1422.94,470.26 1430.6,462.6 1430.6,455.1 1483.44,402.26 1483.44,285.24 1468.19,270 1378.59,270 ; 155,449.57 155,185 220,120 510.77,120 560,169.23 v1(560,200) 588.83,228.83 1129.09,228.83 1170.26,270 ; 155,449.57 155,945 ; 155,945 155,1375 183.58,1403.58 I2C.1@239.45,1403.58 368.34,1403.58 ; 1170.26,270 1378.59,270
  Bottom Layer w10: v1@561.85,198.15 575.03,198.15 589.49,183.68 589.49,152 U1.24@590.49,151 ; U1.49@905.45,448 905.45,384.08 949.45,340.08 1239.72,340.08 1255.34,324.46 v1(1255.34,270.6)
  Bottom Layer w19.68: v1(334.78,980) 379.63,980 387.06,987.43 RT1.2@394.72,979.77
+5.0V: C30.1 C32.1 L1.2 R3.1 R9.1 R10.1 U3.1 U3.3 | length 2066.1
  Top Layer w23.62: v1(776.31,1184.56) 776.31,1169.96 R3.1@793.52,1152.75 ; U3.1@1320.4,1071.65 v1(1320.4,985) C30.1@1321.5,985 ; C32.1@1394.09,985 U3.3@1394.09,1064.13
  Top Layer w39.37: C30.1@1321.5,985 C32.1@1394.09,985 ; C32.1@1404.98,988.8 C32.1@1413.89,979.9 ; C32.1@1413.33,976.1 1545,844.43 v1(1545,615) v1(1545,588.75) v1(1545,562.5) v1(1545,536.25) v1@1545,512.29
  SIGNAL w23.62: v1(776.31,1184.56) 1015.54,1184.56 1215.1,985 v1(1320.4,985)
  Bottom Layer w10: R10.1@1367.57,110 1378.31,120.75 1410.3,120.75 1441.56,152 1490.91,152 1517.25,178.33 R9.1@1521.5,178.33 1525.75,178.33 1555,207.58 1555,384.21 L1.2@1508.9,430.31
  Bottom Layer w39.37: L1.2@1508.9,469.69 1545,505.79 v1(1545,510) v1(1545,536.25) v1(1545,562.5) v1(1545,588.75) v1(1545,615)
AH: U1.17 U2.29 | length 996.5
  Top Layer w10: v1@651.42,776.02 v1@652.48,776.02 ; v1@651.42,779.18 675.74,803.5 708.88,803.5 717.85,794.53 U2.29@763.69,794.53
  SIGNAL w10: v1@652.48,780.64 684.92,748.2 684.92,655.61 762,578.53 762,466.34 647.87,352.21 647.87,217.13 728.29,136.71 v1(728.29,94.11)
  Bottom Layer w10: v1(728.29,94.11) U1.17@728.29,151
  other v1: 651.42,780.64
AL: U1.18 U2.17 | length 1543.5
  Top Layer w10: v1@863.97,818.14 894.9,818.14 959.54,882.78 959.54,931.32 U2.17@960.54,932.32
  SIGNAL w10: v1(709.11,109.11) 709.11,85.89 723.78,71.22 744.24,71.22 792.35,119.33 1045,119.33 1115.67,190 1115.67,755.75 1055.14,816.28 v1(862.11,816.28)
  Bottom Layer w10: U1.18@708.6,151 708.86,150.74 v1@708.86,109.37
BH: U1.19 U2.30 | length 955
  Top Layer w10: v1@652.48,754.59 675.83,777.93 687.06,789.17 702.94,789.17 717.27,774.84 U2.30@763.69,774.84
  SIGNAL w10: v1(651.42,754.59) 652.48,754.59 670.59,736.48 670.59,649.68 742.11,578.16 742.11,466.71 633.54,358.14 633.54,211.2 689.78,154.95 v1(689.78,94.11)
  Bottom Layer w10: U1.19@688.92,151 689.35,150.57 v1@689.35,94.55
BL: U1.20 U2.18 | length 1608.4
  Top Layer w10: v1@863.97,846.28 897.29,846.28 939.85,888.84 939.85,931.32 U2.18@940.85,932.32
  SIGNAL w10: v1(668.78,109.11) 668.78,85.41 697.31,56.88 750.17,56.88 798.29,105 1050.94,105 1130,184.06 1130,761.69 1047.26,844.43 v1(862.11,844.43)
  Bottom Layer w10: v1@669.01,109.34 669.01,150.78 U1.20@669.23,151
CH: U1.21 U2.31 | length 907.1
  Top Layer w10: v1(651.42,728.54) 689.11,728.54 715.73,755.16 U2.31@763.69,755.16
  SIGNAL w10: v1@649.36,94.14 649.36,170.15 615.02,204.49 615.02,359.89 727.78,472.65 727.78,572.22 651.42,648.58 v1(651.42,728.54)
  Bottom Layer w10: v1@649.44,94.22 649.44,150.89 U1.21@649.55,151
  other v1: 649.33,94.11
CL: U1.22 U2.19 | length 1709.8
  Top Layer w10: v1(901.97,979.13) 920.17,960.93 920.17,933.32 U2.19@921.17,932.32
  SIGNAL w10: v1(630.18,109.11) 630.16,74.19 661.8,42.55 759.55,42.55 807.67,90.67 1056.87,90.67 1145,178.8 1145,771.42 1090,826.42 1090,949.73 1060.61,979.13 v1(901.97,979.13)
  Bottom Layer w10: U1.22@630.02,150.84 630.02,109.27 v1(630.18,109.11)
DC_CAL: U1.12 U2.43 | length 642.2
  Top Layer w10: v1(940.85,505) U2.43@940.85,597.68
  SIGNAL w10: v1(826.71,190) 826.71,177.35 854.06,150 915.27,150 980,214.73 980,465.85 v1(940.85,505)
  Bottom Layer w10: U1.12@826.71,151 v1(826.71,190)
DCBUS: C3.1 C4.1 C17.2 E2.1 E3.1 JP1.1 Q1.D Q2.D Q3.D U1.29 U1.53 U1.54 | length 2403.6
  Bottom Layer w10: E3.1@249.33,500 254.76,500 254.76,477.42 C17.2@337.18,395 ; C17.2@342.18,395 347.18,390 483.07,390 510.75,417.68 U1.29@510.75,447 ; U1.53@984.19,448 985,448.81 985,577.2 1003.88,558.33 U1.54@1003.88,448
  Bottom Layer w62.99: 1410,740 JP1.1@1410,1320
  Bottom Layer w66.93: v1@125,770 132.19,770 ; 295.74,606.46 555,606.46 854.06,606.46 883.32,577.2 985,577.2 1247.2,577.2 1410,740
  other v1: 185,465 213.19,465 185,487.5 213.19,487.5 185,510 213.19,510 1060,572.22 1080,572.22 1060,595 1080,595 915.21,727.13 940.85,727.13 92.83,728.54 120,728.54 92.83,749.27 120,749.27 915,750 940.85,750 92.83,770 120,770
DGND: C20.2 C21.1 C22.2 C23.1 C24.1 C25.1 C26.1 C27.1 C28.1 C29.2 C30.2 C31.2 FB1.2 I2C.4 R27.1 R30.2 SW1.1 SW2.1 SWD1.4 U2.8 U2.23 U2.47 U3.2 UART1.4 | length 5419.4
  Top Layer w10: UART1.4@239.45,221.42 205.98,221.42 174.17,253.23 174.17,352.41 191.76,370 289.02,370 396.5,477.48 C25.1@396.5,488.26 391.5,488.26 381.5,498.26 381.5,538.5 250,670 250,713.37 SWD1.4@239.45,723.92 205.98,723.92 174.17,755.73 174.17,854.91 189.27,870 338.82,870 381.5,912.68 381.5,969.13 391.5,979.13 345.63,1025 255.67,1025 225,1055.67 225,1215.67 I2C.4@235.75,1226.42 ; I2C.4@239.45,1226.42 I2C.4@235.75,1226.42 ; C26.1@688.5,1080 685,1083.5 652.01,1083.5 360.51,1375 185,1375 174.17,1364.17 174.17,1258.23 205.98,1226.42 I2C.4@235.75,1226.42 ; SW1.1@967.68,123.9 967.68,110.12 978.43,99.37 1204.14,99.37 1223.51,80 1276.2,80 1295.57,99.37 1406.65,99.37 1417.4,110.12 SW2.1@1417.4,123.9 ; R27.1@1040.75,385 1051.5,395.75 1051.5,400 1066.5,415 1066.5,508.5 1019.59,555.41 U2.47@1019.59,597.68 1019.59,738.8 1074.32,793.53 1097.33,793.53 U2.8@1098.33,794.53 1158.19,794.53 1217.17,853.51 1309.06,853.51 1319.06,863.51 C22.2@1319.06,868.51
  Top Layer w19.68: C29.2@1241.69,1083.5 1241.69,1085.83 1246.85,1090.98 1284.95,1090.98 1313.96,1120 1375,1120 ; C29.2@1245.1,1085.1 1245.1,988.4 C30.2@1248.5,985 1252.1,981.4 1252.1,940.47 C22.2@1319.06,873.51 ; U3.2@1356.69,1072.76 1356.69,1101.69 1375,1120 ; SW2.1@1417.4,123.9 1417.4,137.68 1423.31,143.58 1464.85,143.58 C24.1@1517.69,196.42 ; R30.2@1473.19,1233.26 1477.44,1233.26 1515,1195.7 1515,1136.81 1466.69,1088.5 1435.19,1120 1375,1120
  Top Layer w31.5: C22.2@1319.06,868.51 1464.69,868.51 1503.19,830 1503.19,663.45 1484.74,645 C20.2@1319.06,645 1319.06,549 1320.35,547.72 FB1.2@1320.35,345.85
  other v1: 459.2,73.66 435,84.17 270,90 405,90 455,155 380,186.67 410,186.67 440,186.67 380,245 410,245 440,245 471.43,245 500,245 380,270 410,270.26 440.31,270.26 500,270 471.43,270.6 35,275 67.5,275 100,275 35,331.86 67.5,331.86 100,331.86 35,390 67.5,390 100,390 310,1375 345,1375 770,1410.93 817.99,1410.93 861.54,1410.93 909.53,1410.93 957.5,1410.93 1005.46,1410.93 770,1439.47 817.96,1439.47 861.54,1439.47 909.51,1439.47 957.47,1439.47 1005.43,1439.47 770,1525 817.99,1525 861.54,1525 909.53,1525 957.5,1525 1005.46,1525 770,1553.54 817.96,1553.54 861.54,1553.54 909.51,1553.54 957.47,1553.54 1005.43,1553.54
EN_GATE: U1.16 U2.40 | length 1438
  Top Layer w10: v1@863.04,789.07 881.8,770.32 U2.40@881.8,597.68
  SIGNAL w10: v1(747.94,109.11) 772.49,133.66 1038.66,133.66 1100,195 1100,751.16 1063.01,788.14 v1(862.11,788.14)
  Bottom Layer w10: v1@747.95,109.13 U1.16@747.97,151
ENCA: MOTOR1.1 R6.2 U2.16 | length 535.5
  Top Layer w10: U2.16@980.22,932.32 981.22,933.32 981.22,986.22 1035,1040 1035,1096.7 1053.3,1115 1103.5,1115 1140,1151.5 1140,1185 1103.5,1221.5 1064.25,1221.5 R6.2@1060,1217.25 ; R6.2@1060,1221.5 MOTOR1.1@1060,1311.81
ENCB: MOTOR1.2 R5.2 U2.41 | length 2066.3
  Top Layer w10: v1(530,385) 797.58,385 901.48,488.9 U2.41@901.48,597.68 ; MOTOR1.2@989.45,1320 989.45,1225.43 R5.2@993.38,1221.5
  SIGNAL w10: v1(530,385) 530,538.67 334.47,734.2 334.47,930.53 678.93,1275 944.45,1275 MOTOR1.2@989.45,1320
ENCZ: MOTOR1.3 R4.2 U2.15 | length 998.5
  Top Layer w10: MOTOR1.3@910.71,1320 955.71,1365 1007.87,1365 1067.87,1425 1139.24,1425 1179.64,1384.6 1179.64,1082.94 1152.36,1055.67 1075.67,1055.67 1000.91,980.91 1000.91,933.32 U2.15@999.91,932.32 ; MOTOR1.3@916.01,1314.7 926.76,1303.95 R4.2@926.76,1221.5
GH_A: R11.2 U1.47 | length 992.5
  Top Layer w10: v1@440,370 v1(440.31,370) 498.97,428.67 818.67,428.67 864.23,474.23 864.23,493.15 v1(866.08,495) v1@866.08,492.38
  SIGNAL w10: v1(355,658.47) 490,523.47 490,414.69 445.31,370 v1(440.31,370) v1@440,370
  Bottom Layer w10: v1(355,658.47) 355,689.39 380,714.39 384.25,714.39 R11.2@395,725.13 ; U1.47@866.08,448 v1(866.08,495)
GH_B: R12.2 U1.42 | length 335.4
  SIGNAL w10: v1(725,670) 726,670 792.35,603.65 792.35,455.96 770.3,433.91 v1(770.3,409.49)
  Bottom Layer w10: U1.42@767.66,448 768.66,447 v1@768.66,411.14
GH_C: R13.2 U1.37 | length 1528.3
  SIGNAL w10: v1(669.12,495) 669.12,521.15 549.33,640.94 549.33,940.94 681.15,1072.76 1007.51,1072.76 1118.66,961.61 1118.66,841.3 1184.13,775.83 1192.58,767.42 v1(1192.58,716.23)
  Bottom Layer w10: v1(669.12,495) 669.17,494.94 U1.37@669.17,448.06 ; R13.2@1158.14,729.22 1171.13,716.23 v1(1192.58,716.23)
GL_A: R16.2 U1.45 | length 1364.9
  Top Layer w10: v1(440.31,450) 460.31,470 801.71,470 v1(826.71,495)
  SIGNAL w10: v1(395,1154.65) 395,1070.7 166.34,842.04 166.34,778.77 440.31,504.8 v1(440.31,450)
  Bottom Layer w10: U1.45@826.71,448 v1(826.71,495)
GL_B: R17.2 U1.40 | length 468.1
  Bottom Layer w10: R17.2@342.18,325 352.92,335.75 562.01,335.75 606.27,380 713.29,380 725.77,392.48 725.77,414.55 727.29,416.07 727.29,447 U1.40@728.29,448
GL_C: R18.2 U1.35 | length 1580.9
  SIGNAL w10: v1(629.86,495) 629.35,495.51 629.35,520.38 392.96,756.77 392.96,907.96 701.34,1216.34 1013.66,1216.34 1190,1040 v1(1215,1040)
  Bottom Layer w10: U1.35@629.86,448 v1(629.86,495)
GND: C1.2 C2.2 C3.2 C4.2 C5.2 C6.1 C10.2 C13.1 C14.1 C15.2 C16.1 C17.1 C18.2 C19.2 C32.2 D1.1 E2.2 E3.2 FB1.1 JP1.2 MOTOR1.4 Q4.S R1.2 R8.1 R14.2 R15.1 R21.1 R22.1 U1.8 U1.28 U1.30 U1.32 U1.44 U1.57 U1.V | length 2171.6
  Top Layer w8: JP1.2@1331.26,1320 JP1.2@1334.72,1320
  Top Layer w10: v1(337.18,1088.83) 433.41,1088.83 552.25,970 R1.2@556.5,970 C1.2@556.5,905 ; v1(1501.08,1027.88) 1501.08,984.06 C32.2@1504.56,980.57
  Top Layer w23.62: v1(1417.4,300) FB1.1@1382.38,335 v1(1417.4,370)
  Bottom Layer w8: E3.2@40.67,500 43.66,502.99 56.99,502.99 75,521 v1(75,525) ; v1(130,215) 133.17,215 161.5,186.67 C19.2@166.5,186.67 ; C18.2@166.5,50 171.5,45 v1(215,45) 264.18,45 C10.2@269.18,50 ; C15.2@269.18,186.67 274.18,186.67 305.04,217.53 v1(305.04,218.23) 302.8,220.47 302.8,226.37 274.18,255 C13.1@269.18,255 264.18,255 253.18,266 253.18,271 217.03,307.15 217.03,347.85 264.18,395 C17.1@269.18,395 ; v1(475,175) 509.75,175 511.75,173 U1.28@511.75,151 ; v1(509.75,502.99) 529.44,483.31 529.44,450 U1.30@531.44,448 ; U1.32@570.81,448 571.43,447.38 v1(571.43,405) ; U1.57@777.5,299.5 807.03,329.03 U1.44@807.03,448 ; U1.V@886,253 905.45,233.55 U1.8@905.45,151 ; C3.2@1127.89,493.5 1205.31,493.5 1210,488.81 1210,429.11 C6.1@1205.89,425 ; C5.2@1136.59,246.67 1141.59,246.67 1152.59,257.67 1152.59,262.25 1205.33,315 v1(1209.59,315) ; v1(1180,135) 1180,134.59 1204.59,110 C2.2@1209.59,110
  Bottom Layer w10: C16.1@1246.52,1405 cw(c1251.52,1405) 1251.52,1410 1331.31,1410 ; C14.1@1343.42,1034.44 cw(c1343.42,1029.24) 1348.62,1029.24 v1(1348.62,937.12) ; R14.2@1367.57,178.33 1371.82,178.33 1413.49,220 v1(1415,220) ; v1(1460,610) 1505,655 E2.2@1529.33,655 ; R15.1@1521.5,110 1530,101.5 v1(1530,77.66)
  Bottom Layer w23.62: v1(1417.4,300) 1480.12,300 D1.1@1495.12,285
  other v1: 1210,493.5 1479.77,1024.08 1521.27,1024.08 1480,1045 1500.75,1045 1521.5,1045 258.7,1088.83 258.7,1115.38 337.18,1115.38 258.7,1141.92 337.18,1141.92 258.7,1168.46 337.18,1168.46 258.7,1195 337.18,1195 1480.23,1301.11 1500.98,1301.11 1521.73,1301.11 1480,1324.05 1500.75,1324.05 1521.5,1324.05 1389.25,1405 1410,1405 1430.75,1405 1389.25,1425 1410,1425 1430.75,1425 1389.25,1445.74 1410,1445.74 1430.75,1445.74 1389.25,1467.13 1410,1467.13 1430.75,1467.13 1389.25,1490 1410,1490 1430.75,1490
I2C_SCL: I2C.3 U2.21 | length 841.5
  Top Layer w10: I2C.3@239.45,1285.47 250.2,1274.72 408.69,1274.72 798.25,885.16 858.23,885.16 880.8,907.73 880.8,931.32 U2.21@881.8,932.32
I2C_SDA: I2C.2 U2.22 | length 832.7
  Top Layer w10: I2C.2@239.45,1344.53 250.2,1333.78 369.9,1333.78 804.19,899.49 852.29,899.49 861.11,908.31 U2.22@861.11,931.32